# Altium PCB PCB1.PcbDoc (part 2 of 2)
Units mm, origin at the board's own origin, x right, y up, seen from the top; angles counter-clockwise.
Board outline 50.96 x 22.34 mm, 2 copper layers (Top Layer, Bottom Layer), stack 0.771 mm thick; 54 components, 41 nets, 158 pads, 78 vias.
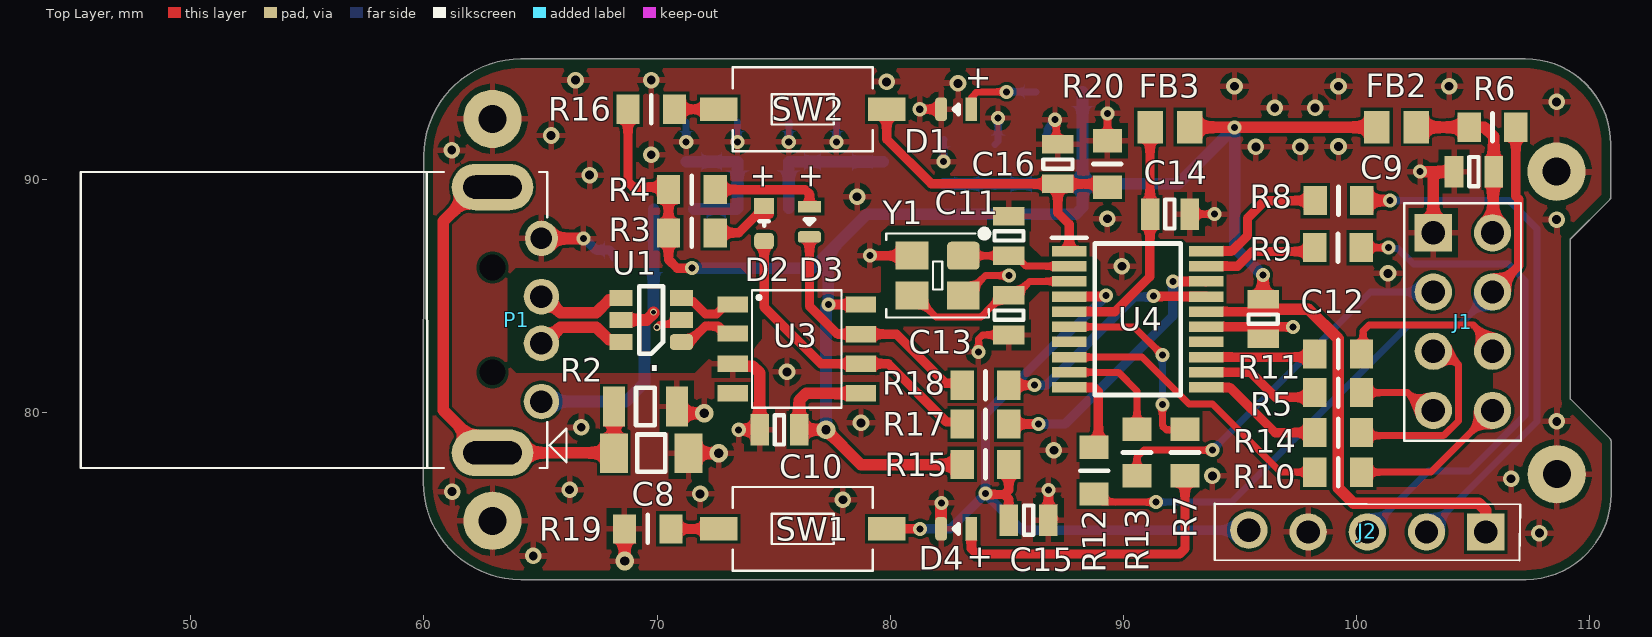
[diagram p0: Top Layer view]

## Via types
v1: diameter 0.711, hole 0.381, Top Layer to Bottom Layer, 35 vias
v2: diameter 0.6, hole 0.3, Top Layer to Bottom Layer, 23 vias
v3: diameter 0.61, hole 0.305, Top Layer to Bottom Layer, 14 vias
v4: diameter 0.8, hole 0.4, Top Layer to Bottom Layer, 4 vias
v5: diameter 0.305, hole 0.2, Top Layer to Bottom Layer, 2 vias

## Nets (pads, with @x,y where several pads share a name; then routed paths per layer and width w, separated by ;. In a path a pad name is that pad's centre, name@x,y a point inside that pad or via, vN(x,y) a via of type N, cw(c..) or ccw(c..) an arc to the next point about the centre after c; other vN are vias at no path point) (continued)
NetD3_2: (continued)
  Top Layer w0.4: R4.2 76.362,89.553 76.537,89.377 D3.2
NetD4_2: D4.2 R7.2 | length 13.3
  Top Layer w0.4: D4.2 83.483,74.16 83.717,73.926 92.41,73.926 92.645,74.16 R7.2
NetJ1_7: J1.7 R5.1 | length 3.4
  Top Layer w0.3: R5.1 102.185,80.843 102.948,80.08 J1.7
NetR8_1: R8.1 U4.20 | length 6
  Top Layer w0.4: U4.20 94.668,86.918 95.325,87.575 95.325,88.33 96.078,89.083 R8.1
NetR9_1: R9.1 U4.19 | length 4.9
  Top Layer w0.4: U4.19 94.9,86.268 95.532,86.9 R9.1@98.216,86.9
NetR10_2: R10.2 U4.8 | length 12.6
  Top Layer w0.3: U4.8 90.801,82.368 92.813,80.355 93.821,80.355 96.745,77.432 R10.2
NetR11_1: R11.1 U4.13 | length 4.7
  Top Layer w0.4: U4.13 98.084,82.368 R11.1
NetR12_1: R12.1 U4.10 | length 3.8
  Top Layer w0.4: U4.10 88.756,81.068 88.931,80.892 88.931,78.681 R12.1
NetR13_2: R13.2 U4.9 | length 4.9
  Top Layer w0.3: U4.9 89.793,81.718 90.589,80.922 R13.2
NetR14_1: R14.1 U4.11 | length 5.5
  Top Layer w0.4: U4.11 94.578,81.068 96.517,79.129 R14.1
NetR16_2: R16.2 SW2.1 | length 1.9
  Top Layer w0.4: R16.2 SW2.1
NetR17_1: R17.1 U4.18 | length 11.7
  Top Layer w0.4: R17.1@85.283,79.5 v2(86.353,79.5) ; v2(92.127,85.614) 92.129,85.616 93.509,85.616 U4.18@93.532,85.593
  Bottom Layer w0.4: v2(86.353,79.5) 87.5,79.5 92.127,84.127 v2(92.127,85.614)
NetR18_1: R18.1 U4.17 | length 9.9
  Top Layer w0.4: R18.1@85.25,81.25 85.338,81.162 v2(86.196,81.162) ; v2(91.29,84.983) 91.297,84.975 93.55,84.975 U4.17
  Bottom Layer w0.4: v2(86.196,81.162) 86.694,81.162 90.476,84.944 91.251,84.944 v2(91.29,84.983)
NetR19_1: R19.1 SW1.1 | length 2.1
  Top Layer w0.4: R19.1 SW1.1
OSC_IN: C11.1 U4.2 Y1.1 | length 4.7
  Top Layer w0.3: Y1.1 C11.1 85.371,86.718 85.821,86.268 U4.2
OSC_OUT: C13.1 U4.3 Y1.3 | length 7.8
  Top Layer w0.3: Y1.3 81.039,85.018 81.966,84.091 83.894,84.091 83.944,84.141 83.954,84.141 84.116,84.303 84.116,84.313 84.821,85.018 85.371,85.018 85.971,85.618 U4.3
RST#: C15.1 J2.5 R15.2 SW1.2 U4.4 | length 32.5
  Top Layer w0.4: SW1.2 v2(81.282,75) ; v2(84.088,76.511) 84.127,76.473 84.892,76.473 ; C15.1 85.088,76.277 84.892,76.473 ; R15.2 85.088,76.669 84.892,76.473 ; U4.4 89.222,84.968 v3(89.26,85.005)
  Bottom Layer w0.4: v2(81.282,75) 82.577,75 v2(84.088,76.511) 84.088,79.942 87.406,83.259 87.513,83.259 v3(89.26,85.005) ; v2@84.091,76.508 85.655,74.944 J2.5
SPI_CSN: J1.4 R6.1 R12.2 | length 28.6
  Top Layer w0.3: R12.2 89.1,76.15 v2(91.395,76.15)
  Top Layer w0.4: J1.4 106.967,86.287 106.967,89.146 106.84,89.273 R6.1
  Bottom Layer w0.3: v2(91.395,76.15) 94.643,76.15 102.24,83.747 104.085,83.747 104.088,83.75 104.43,83.75 J1.4
SPI_MISO: R5.2 U4.12 | length 5.1
  Top Layer w0.4: U4.12 95.457,81.718 96.529,80.646 R5.2@98.216,80.646
SPI_MOSI: J1.6 R11.2 | length 7.3
  Top Layer w0.3: R11.2 100.287,82.571 100.287,83.491 100.543,83.747 105.018,83.747 105.84,82.925 J1.6
SPI_SCK: J1.5 R14.2 | length 8.2
  Top Layer w0.3: R14.2 100.342,79.003 103.746,79.003 104.377,79.634 104.377,82.046 104.052,82.371 103.549,82.371 J1.5
SWCLK: J2.2 R8.2 | length 22.9
  Top Layer w0.5: R8.2 v2(101.44,89.083)
  Bottom Layer w0.3: v2@101.498,89.083 106.546,89.083 107.754,87.875 107.754,79.614 J2.2
SWDIO: J2.3 R9.2 | length 22.2
  Top Layer w0.3: R9.2 100.218,87.068 v2(101.375,87.068)
  Bottom Layer w0.3: J2.3 103.091,77.49 104.844,77.49 107.227,79.873 107.227,85.658 106.524,86.361 102.443,86.361 101.775,87.029 101.413,87.029 v2(101.375,87.068)
UART_RX: D2.1 R17.2 U3.6 | length 13.6
  Top Layer w0.4: D2.1 74.593,84.519 77.029,82.082 79.921,82.082 82.417,79.586 83.197,79.586 R17.2@83.283,79.5
UART_TX: D3.1 R18.2 U3.7 | length 11.1
  Top Layer w0.4: D3.1 76.537,84.556 77.734,83.359 78.743,83.359 U3.7 80.273,83.352 82.376,81.25 R18.2@83.25,81.25
pads on no net: P1.NPTH1 P1.NPTH2 U3.4 U4.7 U4.14

## Polygon pours and split planes (outlines as drawn)
GND on Bottom Layer "NONET_L-01_P-001" (solid, remove dead copper, pour order 6): 64.147,72.823 cw(c64.147,77) 59.97,77 60.002,91 cw(c64.167,91) 64.167,95.165 107.247,95.165 cw(c107.247,91.502) 110.911,91.502 110.914,89.238 cw(c110.736,89.238) 110.862,89.113 109.173,87.421 109.181,80.568 110.873,78.879 cw(c110.748,78.754) 110.925,78.754 110.927,76.537 110.931,76.504 cw(c107.253,76.504) 107.292,72.827 107.253,72.823
+3.3V on Bottom Layer "NONET_L-01_P-001" (solid, remove dead copper, pour order 4): 92.414,89.859 92.107,89.551 94.779,89.551 94.779,92.224
+3.3V on Bottom Layer "NONET_L-01_P-001" (solid, remove dead copper, pour order 2): 87.75,89.8 88.25,90.647 88.75,89.8 88.25,88.793
+3.3V on Bottom Layer "NONET_L-01_P-001" (solid, remove dead copper, pour order 1): 77.347,85.932 76.373,85.932 76.15,86.155 76.655,86.155 77.347,86.847
GND on Top Layer "NONET_L-01_P-001" (solid, remove dead copper, pour order 5): 64.147,72.823 cw(c64.147,77) 59.97,77 60.002,91 cw(c64.167,91) 64.167,95.165 107.247,95.165 cw(c107.247,91.502) 110.911,91.502 110.914,89.238 cw(c110.736,89.238) 110.862,89.113 109.173,87.421 109.181,80.568 110.873,78.879 cw(c110.748,78.754) 110.925,78.754 110.927,76.537 110.931,76.504 cw(c107.253,76.504) 107.292,72.827 107.253,72.823

## Other copper
Top Layer:
  pour cut-out: 87.681,84.318 89.638,84.318 91.473,86.153 91.473,87.421 92.542,87.421 92.819,87.143 92.819,80.843 92.798,80.821 92.348,80.821 90.801,82.368 87.681,82.368
  pour cut-out: 99.716,79.754 99.716,76.807 102.567,76.807 105.84,80.08 105.84,82.62 103.3,82.62 103.3,80.08
  pour cut-out: 88.931,80.625 88.931,80.498 88.931,79.181 88.75,79 88.125,79 88.125,76 88.257,75.868 92.512,75.868 93.397,76.752 93.397,80.098 92.706,80.625 89.964,80.625
  pour cut-out: 63.94,86.182 73.564,86.182 74.499,85.247 74.499,83.148 74.214,82.821 73.807,82.414 72.337,82.414 71.616,81.694 63.951,81.694 63.598,82.047 63.606,85.848
  pour cut-out: 89.021,85.443 88.771,85.193 86.446,85.193 85.946,84.693 85.946,83.868 85.771,83.693 79.921,83.693 79.621,83.993 79.621,87.718 79.921,87.993 85.746,88.018 85.971,87.793 85.971,87.168 86.471,86.668 88.821,86.668 88.821,86.661 89.013,86.468

## Silkscreen, mask and mechanical layers (free items; w line width, h text height)
Bottom Overlay:
  text "NRST" at 94.917,76.15 h1.52 r270
GM1-PCB Outline:
  lines w0.1: 60.02,77 ccw(c60.147,77) 60.02,77 ; 60.02,77 ccw(c64.147,77) 64.147,72.873 107.253,72.873 ; 60.02,77 ccw(c60.147,77) 60.02,77 ; 60.02,77 ccw(c60.147,77) 60.02,77 ; 60.02,77 ccw(c60.147,77) 60.02,77 ; 60.02,77 60.052,91 ; 60.052,91 cw(c64.167,91) 64.167,95.115 107.247,95.115 cw(c107.247,91.502) 110.861,91.502 ; 60.052,91 ccw(c64.167,91) 60.052,91 ; 60.052,91 ccw(c64.167,91) 60.052,91 ; 60.052,91 60.052,91 ; 60.052,91 60.052,91 ; 107.253,72.873 ccw(c107.253,73) 107.286,72.877 ; 107.253,72.873 ccw(c107.253,73) 107.286,72.877 ; 107.253,72.873 ccw(c107.253,73) 107.286,72.877 ; 107.253,72.873 ccw(c107.253,73) 107.286,72.877 ; 107.286,72.877 ccw(c107.253,76.504) 110.88,76.504 ; 110.826,89.149 ccw(c110.736,89.238) 110.863,89.238 ; 110.826,89.149 ccw(c110.736,89.238) 110.863,89.238 ; 110.826,89.149 ccw(c110.736,89.238) 110.863,89.238 ; 110.826,89.149 ccw(c110.736,89.238) 110.863,89.238 ; 110.826,89.149 109.123,87.442 109.13,80.547 110.837,78.843 ; 110.837,78.843 cw(c110.748,78.754) 110.875,78.754 ; 110.837,78.843 cw(c110.748,78.754) 110.875,78.754 ; 110.837,78.843 cw(c110.748,78.754) 110.875,78.754 ; 110.837,78.843 cw(c110.748,78.754) 110.875,78.754 ; 110.861,91.502 ccw(c107.247,91.502) 110.861,91.502 ; 110.861,91.502 ccw(c107.247,91.502) 110.861,91.502 ; 110.861,91.502 110.861,91.502 ; 110.861,91.502 110.863,89.238 ; 110.861,91.502 110.861,91.502 ; 110.863,89.238 ccw(c110.736,89.238) 110.863,89.238 ; 110.863,89.238 ccw(c110.736,89.238) 110.863,89.238 ; 110.863,89.238 ccw(c110.736,89.238) 110.863,89.238 ; 110.863,89.238 ccw(c110.736,89.238) 110.863,89.238 ; 110.875,78.754 ccw(c110.748,78.754) 110.875,78.754 ; 110.875,78.754 ccw(c110.748,78.754) 110.875,78.754 ; 110.875,78.754 110.877,76.532 ; 110.877,76.532 cw(c110.753,76.504) 110.88,76.504 ; 110.877,76.532 cw(c110.753,76.504) 110.88,76.504 ; 110.877,76.532 cw(c110.753,76.504) 110.88,76.504 ; 110.877,76.532 cw(c110.753,76.504) 110.88,76.504

## Dimensions
60.06,95.165 to 61.494,72.823 on Mechanical 16
109.181,80.568 to 110.837,78.843 on Mechanical 16
109.123,87.442 to 110.914,87.936 on Mechanical 16
109.181,80.568 to 110.432,72.827 on Mechanical 16
59.97,72.101 to 110.927,72.403 on Mechanical 16

## Text inside footprints (layer, text, board x,y; h text height)
D1: Top Overlay "+" at 84.35,94.728 h1 r180
D2: Top Overlay "+" at 74.125,90.675 h1 r270
D3: Top Overlay "+" at 76.187,90.676 h1 r270
D4: Top Overlay "+" at 84.415,74.183 h1 r180
J1: Bottom Overlay "GND" at 96.95,87.4 h1; Bottom Overlay "VCC" at 101.2,87.4 h1; Bottom Overlay "GDO0" at 96.95,84.35 h1; Bottom Overlay "CSN" at 101.2,84.35 h1; Bottom Overlay "SCK" at 96.95,82.15 h1; Bottom Overlay "MOSI" at 101.2,80.23 h1; Bottom Overlay "MISO" at 96.95,80.23 h1; Bottom Overlay "GPO2" at 101.2,82.15 h1
J2: Bottom Overlay "3.3" at 105.057,76.161 h1 r270; Bottom Overlay "SWC" at 102.507,76.161 h1 r270; Bottom Overlay "GND" at 97.35,76.161 h1 r270; Bottom Overlay "SWD" at 99.957,76.161 h1 r270
P1: GM15-Courtyard "CONNECTOR EDGE" at 60.246,88.987 h0.76 r270